# Altium PCB CC3D_V2.PcbDoc (part 1 of 2)
Units mil, origin at the board's own origin, x right, y up, seen from the top; angles counter-clockwise.
Board outline 1417.32 x 1417.32 mil, 2 copper layers (Top Layer, Bottom Layer), stack 61.2 mil thick; 68 components, 0 nets, 260 pads, 77 vias.
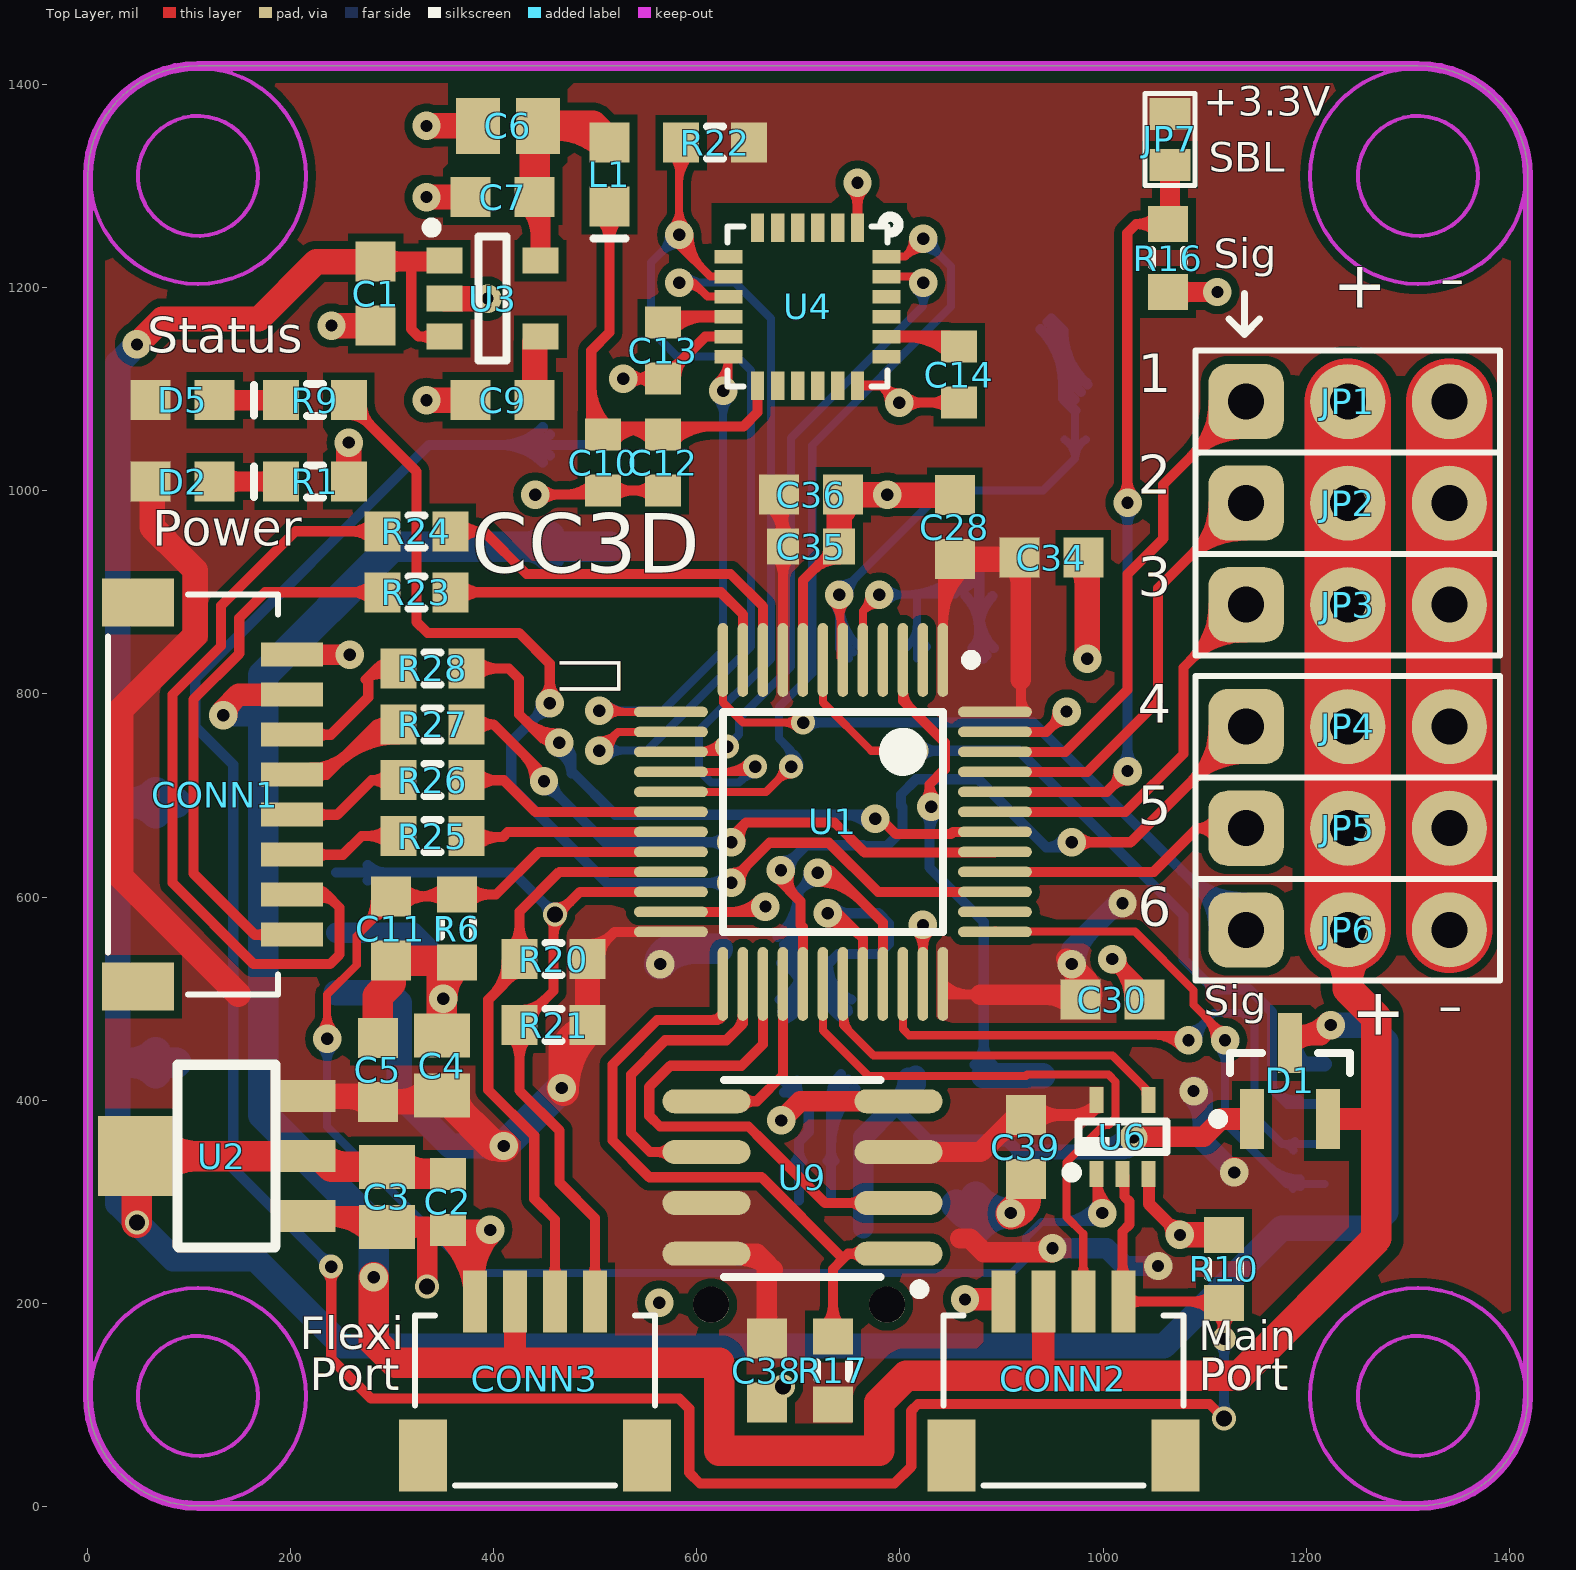
[diagram p0: Top Layer view]
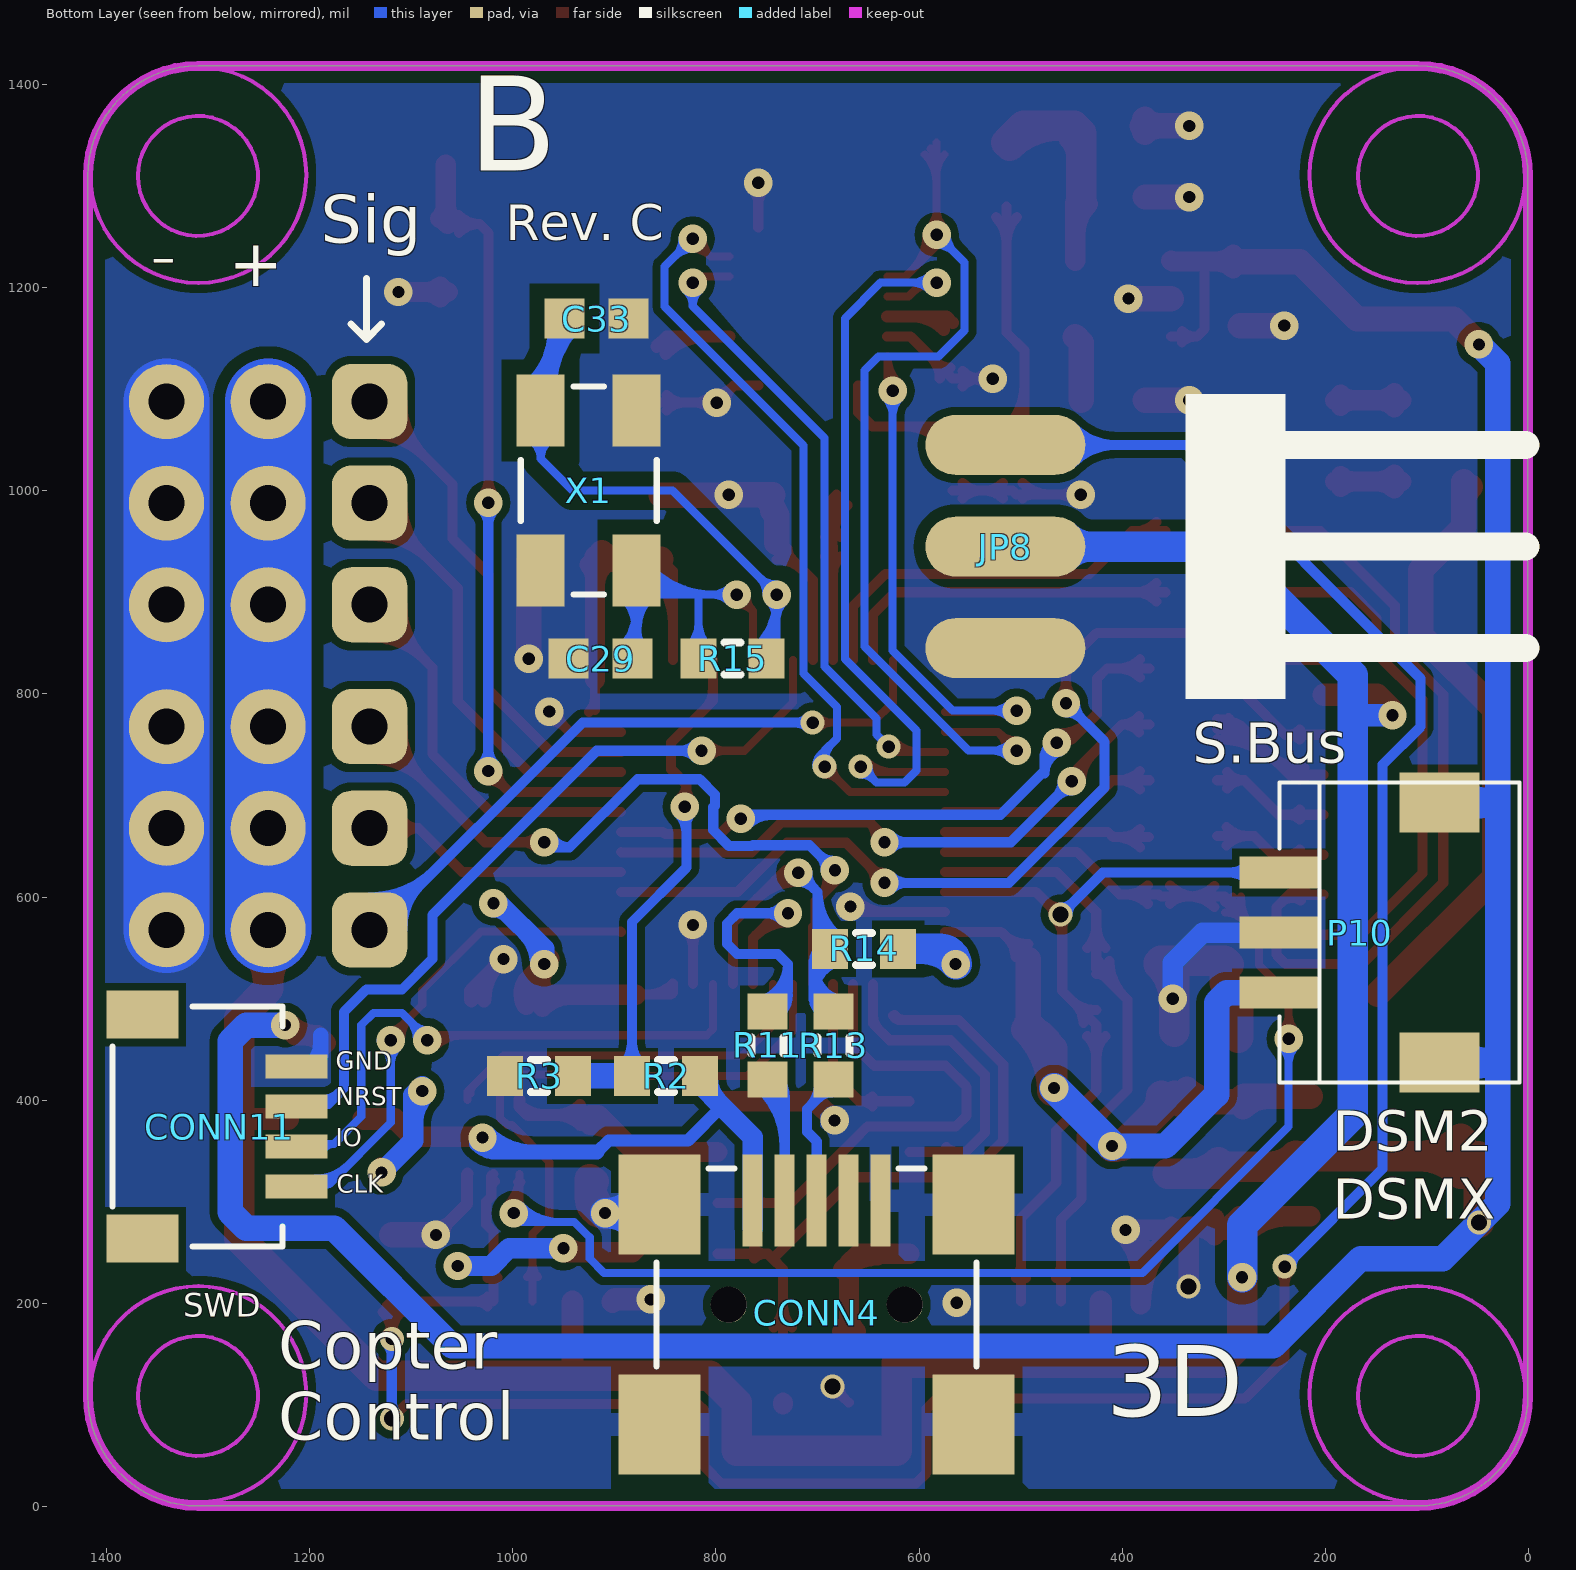
[diagram p1: Bottom Layer view, seen from below]

## Layer stack, top to bottom
Top Layer: signal copper 1.4
Dielectric: core 58.4, FR-4, Dk 4.8
Bottom Layer: signal copper 1.4

## Board outline
0.73,109 ccw(c109,109) 109,0.73 1309.79,0.73 ccw(c1309.79,109) 1418.06,109 1418.06,1309.79 ccw(c1309.79,1309.79) 1309.79,1418.06 109,1418.06 ccw(c109,1309.79) 0.73,1309.79

## Design rules (kind name [scope] priority, off if disabled: settings)
AcuteAngle [All] p1: minimum=6.00000000000000E+0001
Clearance Clearance_osc [InNet('GND') vs InNet('OSC_IN') or InNet('OSC_OUT')] p1: gap=15
Clearance Clearance_outline [All vs OnLayer('Keep-Out Layer')] p2: gap=12
Clearance "VCC_UNREG Pour Clearance" [(InNamedPolygon('Top-VCC') OR InNamedPolygon('Bottom Layer-GND')) vs (InNet('VCC_UNREG'))] p3: gap=12
Clearance "Small Part Clearance" [(HasFootprint('IMU-3000'))] p4: gap=6
Clearance [All] p5: gap=8
ComponentClearance ComponentClearance_servo_headers [InComponent('JP1') or InComponent('JP2') or InComponent('JP3') or InComponent('JP4') or InComponent('JP5') or InComponent('JP6')] p1: gap=5 collisioncheckmode=3 verticalgap=10 showdistances=FALSE
ComponentClearance [All] p2: gap=10 collisioncheckmode=3 verticalgap=10 showdistances=FALSE
DiffPairsRouting [All] p1: maxlimit=20 minlimit=6 mostfreqgap=10 maxuncoupledlength=500
HoleSize [All] p1: absolutevalues=TRUE maxlimit=1000 minlimit=12 maxpercent=80.000 minpercent=20.000
MinimumAnnularRing [All] p1: minimumring=3.94
MinimumSolderMaskSliver MinimumSolderMaskSliver_FIL1-3 [InComponent('FIL1') or InComponent('FIL2') or InComponent('FIL3')] p1: minsoldermaskwidth=1
MinimumSolderMaskSliver [All] p2: minsoldermaskwidth=3
PlaneClearance [All] p1: clearance=15
PlaneConnect [All] p1: planeconnectstyle=Direct reliefexpansion=20 reliefentries=4 reliefconductorwidth=10 reliefairgap=10
PolygonConnect PolygonConnect_usb [InComponent('CONN4')] p1: connectstyle=Relief reliefconductorwidth=22 reliefentries=4 polygonreliefangle="90 Angle"
PolygonConnect [All] p2: connectstyle=Direct reliefconductorwidth=12 reliefentries=4 polygonreliefangle="90 Angle"
RoutingVias [All] p1: holewidth=15 width=31 viastyle="Through Hole" minholewidth=12 minwidth=23.62 maxholewidth=28 maxwidth=50
SilkToSilkClearance SilkToSilkClearance_text [IsText] p1: silktosilkclearance=0
SilkToSilkClearance [All] p2: silktosilkclearance=4
SilkscreenOverComponentPads [All] p1: minsilkscreentomaskgap=2
SolderMaskExpansion [All] p1: expansion=3
Width [All] p1: maxlimit=400 minlimit=7.87 preferedwidth=10
20 further rules are at their usual default settings.

## Classes and differential pairs
differential pair USB_D: +"" -""
differential pair USB_R: +"" -""

## Components (designator, comment, footprint, x,y, rotation, side; value= is the part's Value field where it differs from the comment)
C1 "Cap603" CAP603N 284,1194 r270 top locked
C2 "Cap603" CAP603L 355,300 r270 top
C3 "Cap805" CAP805L 295,305 r270 top
C4 "Cap805" CAP805L 349,434 r90 top locked
C5 "Cap603" CAP603N 286.06,430 r90 top
C6 "Cap805" CAP805L 414,1359 r180 top locked
C7 "Cap603" CAP603N 409,1289 r180 top locked
C9 "Cap603" CAP603N 409,1089 r180 top locked
C10 "Cap603" CAP603L 507.87,1027.56 r270 top
C11 "Cap603" CAP603N 299,569 r270 top locked
C12 "Cap603" CAP603L 566.93,1027.56 r270 top
C13 "Cap603" CAP603L 566.93,1137.8 r270 top
C14 "Cap603" CAP603L 858.27,1114.17 r90 top
C28 "Cap603" CAP603N 854,964 r270 top locked
C29 "Cap603" CAP603N 913.39,834.65 r180 bottom
C30 "Cap603" CAP603N 1009,499 r180 top locked
C33 "Cap603" CAP603N 917.32,1169.29 r0 bottom
C34 "Cap603" CAP603N 949,934 r180 top locked
C35 "Cap603" CAP603L 712.6,944.88 r0 top
C36 "Cap603" CAP603N 712.6,996.06 r180 top
C38 "Cap603" CAP603N 669,134 r270 top locked
C39 "Cap603" CAP603N 924,354 r270 top locked
CONN1 "RC Input" "JST SH 8 Pin Side Entry" 20.73,700.73 r270 top locked
CONN2 "USART 1" "JST SH 4 Pin Side Entry" 960.73,20.73 r0 top locked
CONN3 "Flexi Port" "JST SH 4 Pin Side Entry" 440.73,20.73 r0 top locked
CONN4 "USB" "USB SMD" 700.73,80.73 r180 bottom locked
CONN11 "SWD" "JST SH 4 Pin Side Entry" 1394,374 r270 bottom
D1 "BAT54C" SOT23-3N 1184,419 r90 top locked
D2 "Green" LED603N 94,1009 r180 top locked
D5 "Blue" LED603N 94,1089 r180 top locked
JP1 "Servo out 1" "SIP3 - 0.1" 1140.73,1087.73 r0 top locked
JP2 "Servo out 2" "SIP3 - 0.1" 1140.73,987.73 r0 top locked
JP3 "Servo out 3" "SIP3 - 0.1" 1140.73,887.73 r0 top locked
JP4 "Servo out 4" "SIP3 - 0.1" 1140.73,767.73 r0 top locked
JP5 "Servo out 5" "SIP3 - 0.1" 1140.73,667.73 r0 top locked
JP6 "Servo out 6" "SIP3 - 0.1" 1140.73,567.73 r0 top locked
JP7 "2 PAD Touch JMP" "TOUCH JMP 2PAD" 1065.73,1345.73 r180 top locked
JP8 "S_BUS" "SIP3 - SMT" 515,1045 r270 bottom
L1 "FB 300mA" IND603N 514,1311.17 r90 top locked
P10 "SPEK SAT" 1.5*3_SMT 245,565 r270 bottom
R1 "Res603" RES603N 224,1009 r180 top locked
R2 "Res603" RES603N 849,424 r0 bottom locked
R3 "Res603" RES603N 974,424 r180 bottom locked
R6 "Res603" RES603N 364,569 r90 top locked
R9 "Res603" RES603N 224,1089 r0 top locked
R10 "Res603" RES603N 1119,234 r270 top locked
R11 "Res603" RES603N 749,454 r270 bottom locked
R13 "Res603" RES603N 684,454 r270 bottom locked
R14 "Res603" RES603N 654,549 r0 bottom locked
R15 "Res603" RES603N 783.46,834.65 r0 bottom
R16 "Res603" RES603N 1064,1229 r90 top locked
R17 "Res603" RES603N 734,134 r90 top locked
R20 "Res603" RES603N 459,539 r0 top locked
R21 "Res603" RES603N 459,474 r0 top locked
R22 "Res603" RES603N 618.11,1342.52 r0 top
R23 "Res603" RES603N 324,900 r180 top
R24 "Res603" RES603N 324,960 r180 top
R25 "Res603" RES603N 340,660 r180 top
R26 "Res603" RES603N 340,715 r180 top
R27 "Res603" RES603N 340,770 r180 top
R28 "Res603" RES603N 340,825 r180 top
U1 "STM32F103CBT6" "STM32 48 Lead" 734,674 r270 top locked
U2 "HT7533" SOT89 140,345 r90 top
U3 "LP2992-3.3" SOT23-5L 399,1189 r0 top locked
U4 "MPU-6000" IMU-3000 709,1181.17 r270 top
U6 "XOR" DCK-5 1019,364 r90 top locked
U9 "Flash 16Mbits" SOIC8_N 704,324 r180 top locked
X1 "8MHz" "XTAL ACT530SMX-4 Series" 925.2,1000 r270 bottom

## Footprints (in the part's own frame and the unit in brackets; to place one, negate y for a bottom-side part, rotate by r counter-clockwise, add the part's x,y. Pads: shape width x height; smd on the part's side, far side on the other; paste and mask are expansions set on the pad)
1.5*3_SMT [mm]
  rect 1.5x2 smd: 0(-3.25,4) 0(3.25,4)
  rect 0.8x2 smd: 1(-1.5,0) 2(0,0) 3(1.5,0)
  silkscreen extent -3.75,0 3.75,6
CAP603L [mm] "Chip Capacitor, Body 1.6x0.8mm, IPC High Density"
  rect 0.8x0.9 smd: 1(-0.7,0) 2(0.7,0)
  body extent -0.8,-0.4 0.8,0.4, height 0.77
CAP603N [mm] "Chip Capacitor, Body 1.6x0.8mm, IPC Medium Density"
  rect 1x1 smd: 1(-0.8,0) 2(0.8,0)
  body extent -0.8,-0.4 0.8,0.4, height 0.77
CAP805L [mm] "Chip Capacitor, Body 2.0x1.3mm, IPC High Density"
  rect 1.1x1.4 smd: 1(-0.75,0) 2(0.75,0)
  body extent -1,-0.62 1,0.63, height 0.78
DCK-5 [mm] "SOT23-DCK, 5-Leads, Body 2.2x2.4mm (max), Pitch 0.65mm, IPC High Density"
  rect 0.65x0.35 smd mask+0.076: 1(-0.925,0.65) 2(-0.925,0) 3(-0.925,-0.65) 4(0.925,-0.65) 5(0.925,0.65)
  silkscreen extent -0.45,-1.1 0.38,1.1, body extent -1.05,-1.05 1.05,1.05, height 1
IMU-3000 [mm]
  rect 0.711x0.337 smd paste-0.03 mask+0.04: 1(-1.975,1.25) 2(-1.975,0.75) 3(-1.975,0.25) 4(-1.975,-0.25) 5(-1.975,-0.75) 6(-1.975,-1.25) 13(1.975,-1.25) 14(1.975,-0.75) 15(1.975,-0.25) 16(1.975,0.25) 17(1.975,0.75) 18(1.975,1.25)
  rect 0.337x0.711 smd paste-0.03 mask+0.04: 7(-1.25,-1.975) 8(-0.75,-1.975) 9(-0.25,-1.975) 10(0.25,-1.975) 11(0.75,-1.975) 12(1.25,-1.975) 19(1.25,1.975) 20(0.75,1.975) 21(0.25,1.975) 22(-0.25,1.975) 23(-0.75,1.975) 24(-1.25,1.975)
  silkscreen extent -2.25,-2 2,2.27, body extent -2,-2 2,2, height 0.95
IND603N [mm] "Chip Inductor, Body 1.6x0.8mm, IPC Medium Density"
  rect 1x1 smd: 1(-0.8,0) 2(0.8,0)
  silkscreen extent -1.6,-0.4 -1.6,0.4, body extent -0.87,-0.48 0.87,0.48, height 0.71
"JST SH 4 Pin Side Entry" [mm] "SM04B-SRSS-TB"
  rect 1.2x1.8 smd paste+0 mask+0.051: 0(-2.8,0.75) 0(2.8,0.75)
  rect 0.6x1.55 smd paste+0 mask+0.051: 1(-1.5,4.6) 2(-0.5,4.6) 3(0.5,4.6) 4(1.5,4.6)
  silkscreen extent -3,0 3,4.25, body extent -3,0 3,4.95, height 2.92
"JST SH 8 Pin Side Entry" [mm] "SM08B-SRSS-TB"
  rect 1.2x1.8 smd paste+0 mask+0.051: 0(-4.8,0.75) 0(4.8,0.75)
  rect 0.6x1.55 smd paste+0 mask+0.051: 1(-3.5,4.6) 2(-2.5,4.6) 3(-1.5,4.6) 4(-0.5,4.6) 5(0.5,4.6) 6(1.5,4.6) 7(2.5,4.6) 8(3.5,4.6)
  silkscreen extent -5,0 5,4.25, body extent -5,0 5,4.95, height 2.92
LED603N [mm] "Chip LED, Body 1.6x0.8mm, IPC Medium Density"
  rect 1x1 smd: 1(-0.8,0) 2(0.8,0)
  silkscreen extent -1.78,-0.38 -1.78,0.38, body extent -0.82,-0.38 0.82,0.34, height 0.68
RES603N [mm] "Chip Resistor, Body 1.6x0.8mm, IPC Medium Density"
  rect 0.9x1 smd: 1(-0.85,0) 2(0.85,0)
  silkscreen extent -0.2,-0.4 0.2,0.4, body extent -0.8,-0.4 0.8,0.4, height 0.44
"SIP3 - 0.1" [mil]
  rrect50% 74x74 hole 35.43: 1(0,0)
  round 74 hole 35.43: 2(100,0) 3(200,0)
  silkscreen extent -50,-50 250,50, body extent -47,-47 248,47, height 394
"SIP3 - SMT" [mm]
  oval 1.5x4 smd: 1(0,0) 2(2.54,0) 3(5.08,0)
  silkscreen extent -1.27,4.5 6.35,13
SOIC8_N [mm] "8-Pin Small Outline Integrated Circuit Package (SOIC8), IPC Medium Density"
  oval 2.2x0.6 smd: 1(-2.4,1.905) 2(-2.4,0.635) 3(-2.4,-0.635) 4(-2.4,-1.905) 5(2.4,-1.905) 6(2.4,-0.635) 7(2.4,0.635) 8(2.4,1.905)
  silkscreen extent -3.05,-2.44 1.96,2.92, body extent -3.01,-2.5 3.01,2.5, height 1.75
SOT23-3N [mm] "SOT23, 3-Leads, Body 2.9x1.3mm, Pitch 0.95mm, Lead Span 2.5mm, IPC Medium Density"
  rect 1.5x0.6 smd: 1(-0.95,0.95) 2(-0.95,-0.95) 3(0.95,0)
  silkscreen extent -1.07,-1.5 0.7,1.92, body extent -1.21,-1.45 1.21,1.45, height 0.99
SOT23-5L [mm] "SOT23, 5-Leads, Body 2.9x1.6mm, Pitch 0.95mm, Lead Span 2.8mm, IPC High Density"
  rect 0.9x0.65 smd mask+0.076: 1(-1.2,0.95) 2(-1.2,0) 3(-1.2,-0.95) 4(1.2,-0.95) 5(1.2,0.95)
  silkscreen extent -1.65,-1.55 0.35,1.9, body extent -1.17,-1.46 1.17,1.46, height 0.97
SOT89 [mm]
  rect 2x2 smd: 1(0,2.291)
  rect 0.8x1.5 smd: 1(0,-1.9) 2(1.5,-1.9) 3(-1.5,-1.9)
  silkscreen extent -2.29,-1.15 2.29,1.3
"STM32 48 Lead" [mm] "Thin QFP, 48-Leads, Body 7x7mm, Pitch 0.5mm, IPC Medium Density"
  oval 1.85x0.265 smd mask+0.076: 1(-4.05,2.75) 2(-4.05,2.25) 3(-4.05,1.75) 4(-4.05,1.25) 5(-4.05,0.75) 6(-4.05,0.25) 7(-4.05,-0.25) 8(-4.05,-0.75) 9(-4.05,-1.25) 10(-4.05,-1.75) 11(-4.05,-2.25) 12(-4.05,-2.75) 25(4.05,-2.75) 26(4.05,-2.25) 27(4.05,-1.75) 28(4.05,-1.25) 29(4.05,-0.75) 30(4.05,-0.25) 31(4.05,0.25) 32(4.05,0.75) 33(4.05,1.25) 34(4.05,1.75) 35(4.05,2.25) 36(4.05,2.75)
  oval 0.265x1.85 smd mask+0.076: 13(-2.75,-4.05) 14(-2.25,-4.05) 15(-1.75,-4.05) 16(-1.25,-4.05) 17(-0.75,-4.05) 18(-0.25,-4.05) 19(0.25,-4.05) 20(0.75,-4.05) 21(1.25,-4.05) 22(1.75,-4.05) 23(2.25,-4.05) 24(2.75,-4.05) 37(2.75,4.05) 38(2.25,4.05) 39(1.75,4.05) 40(1.25,4.05) 41(0.75,4.05) 42(0.25,4.05) 43(-0.25,4.05) 44(-0.75,4.05) 45(-1.25,4.05) 46(-1.75,4.05) 47(-2.25,4.05) 48(-2.75,4.05)
  silkscreen extent -4.17,-2.75 2.75,3.58, body extent -4.5,-4.49 4.5,4.51, height 1.56
"TOUCH JMP 2PAD" [mil] "Touch Jumper 2 Pad"
  rect 40x31.5 smd mask+0: 1(0,25) 2(0,-25)
  silkscreen extent -25,-45 25,45
"USB SMD" [mm] "DX2R005HN2E700"
  rect 2.05x2.5 smd: 0(-3.925,0) 0(-3.925,5.5) 0(3.925,0) 0(3.925,5.5)
  rect 0.5x2.3 smd mask+0.085: 1(-1.6,5.6) 2(-0.8,5.6) 3(0,5.6) 4(0.8,5.6) 5(1.6,5.6)
  round 0.9 hole 0.9 unplated: 6(-2.2,3) 6(2.2,3)
  silkscreen extent -4,1.45 4,6.4, body extent -4.95,-2.85 4.95,6.35, height 4.17
"XTAL ACT530SMX-4 Series" [mm] "ACT530SMX-4Series from ACT"
  rect 1.8x1.2 smd: 1(-2,-1.2) 2(2,-1.2) 3(2,1.2) 4(-2,1.2)
  silkscreen extent -2.6,-1.7 2.6,1.7, body extent -2.5,-1.6 2.5,1.6, height 1

## Part data
C1 C2 C3 C4 C5 C6 C7 C9 C10 C11 C12 C13 C14 C28 C29 C30 C33 C34 C35 C36 C38 C39: "Capacitor SMD"
CONN1: library part "JST-SH 8-pin Side Entry Socket", "JST-SH 8-pin Side Entry Socket"
CONN2 CONN3 CONN11: library part "JST-SH 4-pin Side Entry Socket", "JST-SH 4-pin Side Entry Socket"
CONN4: library part USB_SMT_B, "USB Type-B SMT Socket"
D1: "Dual Diode Command Cathode"
D2: library part "LED 603 Gr", "Green 603 LED"
D5: library part "LED 603 Bl", "Blue 603 LED"
JP1 JP2 JP3 JP4 JP5 JP6 JP8: library part "Hdr 3 Pin 0.1", "Header, 3-Pin, 0.1\""
JP7: "2 Pad Touch Jumper"
L1: library part FerriteBead_300mA, "Ferrite Bead 300mA"
P10: library part "Header 3", "Header, 3-Pin"
R1 R2 R3 R6 R9 R10 R11 R13 R14 R15 R16 R17 R20 R21 R22 R23 R24 R25 R26 R27 R28: "Resistor SMD"
U1: "STM32 ARM-based 32-bit MCU with 128 Kbytes Flash, 48-pin LQFP, Industrial Temperature"
U2: library part HT75xx
U3: library part LP2985-3.3, "3.3V 250mA LDO Regulator"
U4: library part MPU-3/6000, "Invensense MPU-3/6000,  3-axis Gyros & Accel on 6000"
U6: library part "XOR SN74LVC1G86DCKR", "XOR Gate SN74LVC1G86DCKR"
U9: library part "Flash 16Mb 75MHZ 8SOIC", "16Mbit SPI Flash Memory"
X1: library part "XTAL ACT530SMX-4", "Surface Mount Quartz Crystal, Digikey 535-9720-1-ND"

## Via types
v1: diameter 28, hole 12, Top Layer to Bottom Layer, tented both sides, 66 vias
v2: diameter 23.62, hole 12, Top Layer to Bottom Layer, tented both sides, 6 vias
v3: diameter 23.62, hole 15.75, Top Layer to Bottom Layer, tented both sides, 5 vias

## Nets (pads, with @x,y where several pads share a name; then routed paths per layer and width w, separated by ;. In a path a pad name is that pad's centre, name@x,y a point inside that pad or via, vN(x,y) a via of type N, cw(c..) or ccw(c..) an arc to the next point about the centre after c; other vN are vias at no path point)
pads on no net: C1.1 C1.2 C2.1 C2.2 C3.1 C3.2 C4.1 C4.2 C5.1 C5.2 C6.1 C6.2 C7.1 C7.2 C9.1 C9.2 C10.1 C10.2 C11.1 C11.2 C12.1 C12.2 C13.1 C13.2 C14.1 C14.2 C28.1 C28.2 C29.1 C29.2 C30.1 C30.2 C33.1 C33.2 C34.1 C34.2 C35.1 C35.2 C36.1 C36.2 C38.1 C38.2 C39.1 C39.2 CONN1.0 CONN1.1 CONN1.2 CONN1.3 CONN1.4 CONN1.5 CONN1.6 CONN1.7 CONN1.8 CONN2.0 CONN2.1 CONN2.2 CONN2.3 CONN2.4 CONN3.0 CONN3.1 CONN3.2 CONN3.3 CONN3.4 CONN4.0 CONN4.1 CONN4.2 CONN4.3 CONN4.4 CONN4.5 CONN4.6 CONN11.0 CONN11.1 CONN11.2 CONN11.3 CONN11.4 D1.1 D1.2 D1.3 D2.1 D2.2 D5.1 D5.2 JP1.1 JP1.2 JP1.3 JP2.1 JP2.2 JP2.3 JP3.1 JP3.2 JP3.3 JP4.1 JP4.2 JP4.3 JP5.1 JP5.2 JP5.3 JP6.1 JP6.2 JP6.3 JP7.1 JP7.2 JP8.1 JP8.2 JP8.3 L1.1 L1.2 P10.0 P10.1 P10.2 P10.3 R1.1 R1.2 R2.1 R2.2 R3.1 R3.2 R6.1 R6.2 R9.1 R9.2 R10.1 R10.2 R11.1 R11.2 R13.1 R13.2 R14.1 R14.2 R15.1 R15.2 R16.1 R16.2 R17.1 R17.2 R20.1 R20.2 R21.1 R21.2 R22.1 R22.2 R23.1 R23.2 R24.1 R24.2 R25.1 R25.2 R26.1 R26.2 R27.1 R27.2 R28.1 R28.2 U1.1 U1.2 U1.3 U1.4 U1.5 U1.6 U1.7 U1.8 U1.9 U1.10 U1.11 U1.12 U1.13 U1.14 U1.15 U1.16 U1.17 U1.18 U1.19 U1.20 U1.21 U1.22 U1.23 U1.24 U1.25 U1.26 U1.27 U1.28 U1.29 U1.30 U1.31 U1.32 U1.33 U1.34 U1.35 U1.36 U1.37 U1.38 U1.39 U1.40 U1.41 U1.42 U1.43 U1.44 U1.45 U1.46 U1.47 U1.48 U2.1 U2.2 U2.3 U3.1 U3.2 U3.3 U3.4 U3.5 U4.1 U4.2 U4.3 U4.4 U4.5 U4.6 U4.7 U4.8 U4.9 U4.10 U4.11 U4.12 U4.13 U4.14 U4.15 U4.16 U4.17 U4.18 U4.19 U4.20 U4.21 U4.22 U4.23 U4.24 U6.1 U6.2 U6.3 U6.4 U6.5 U9.1 U9.2 U9.3 U9.4 U9.5 U9.6 U9.7 U9.8 X1.1 X1.2 X1.3 X1.4